# Altium PCB booster_pcb.PcbDoc
Units mil, origin at the board's own origin, x right, y up, seen from the top; angles counter-clockwise.
Board outline 900 x 700 mil, 4 copper layers (Top Layer, Layer 2, Layer 3, Bottom Layer), stack 23.756 mil thick; 17 components, 15 nets, 55 pads, 21 vias.
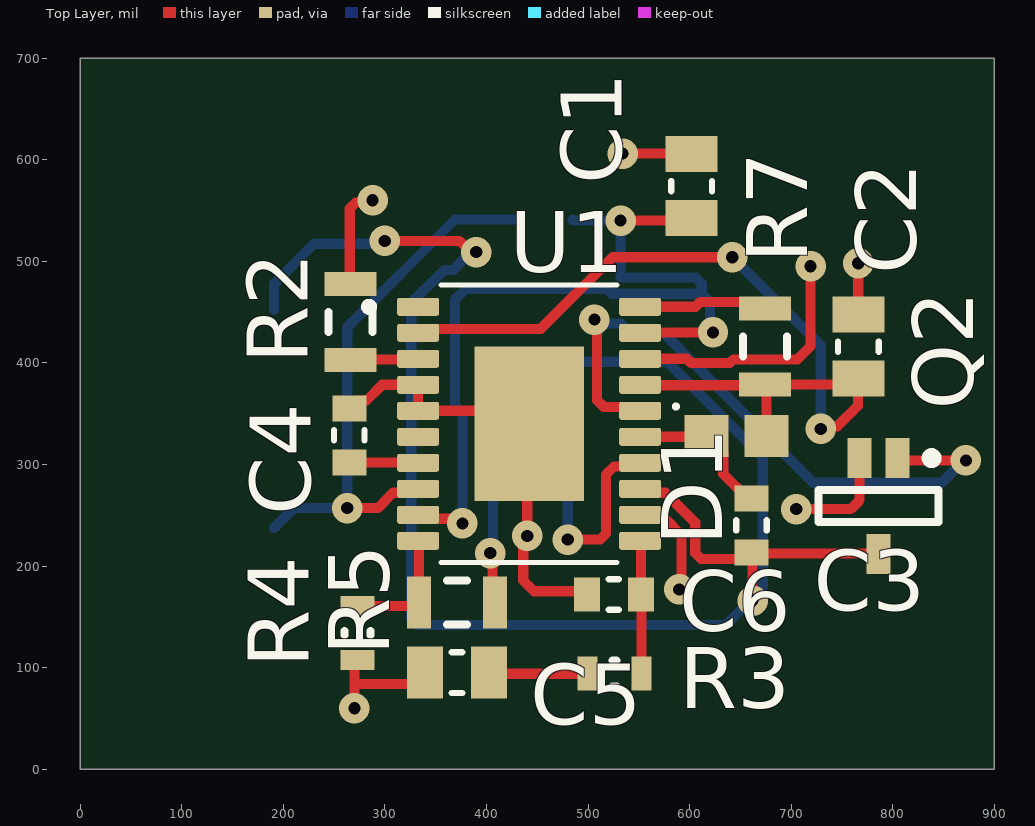
[diagram p0: Top Layer view]
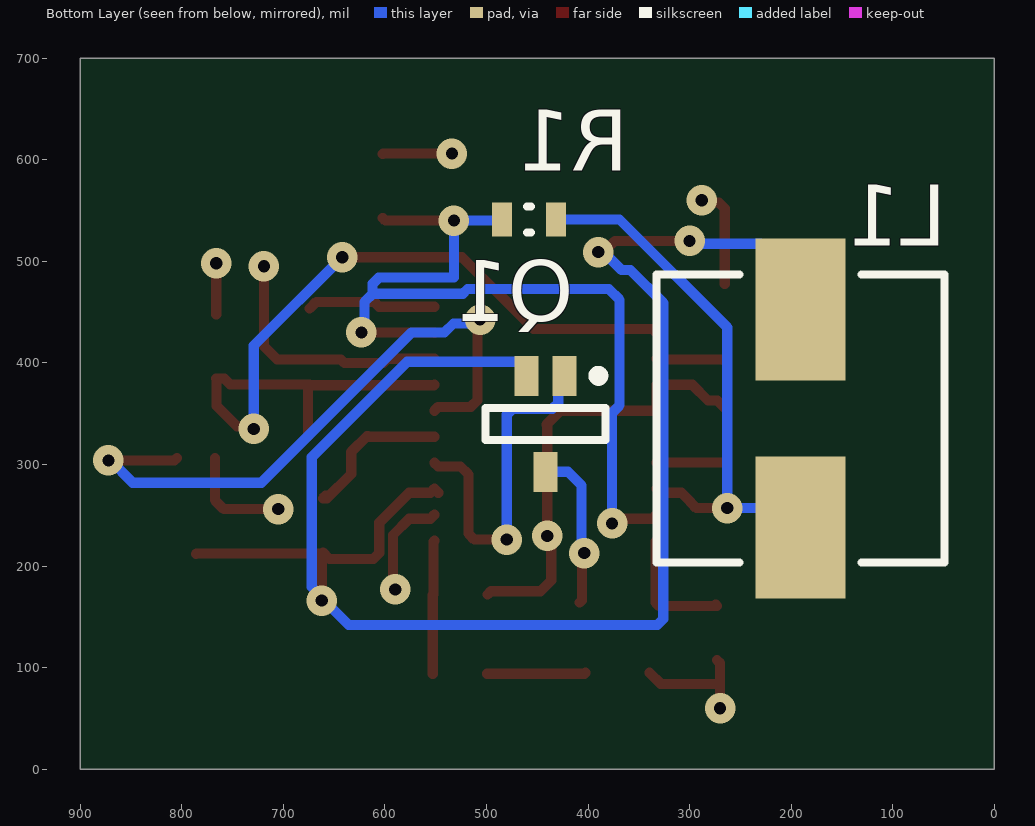
[diagram p1: Bottom Layer view, seen from below]
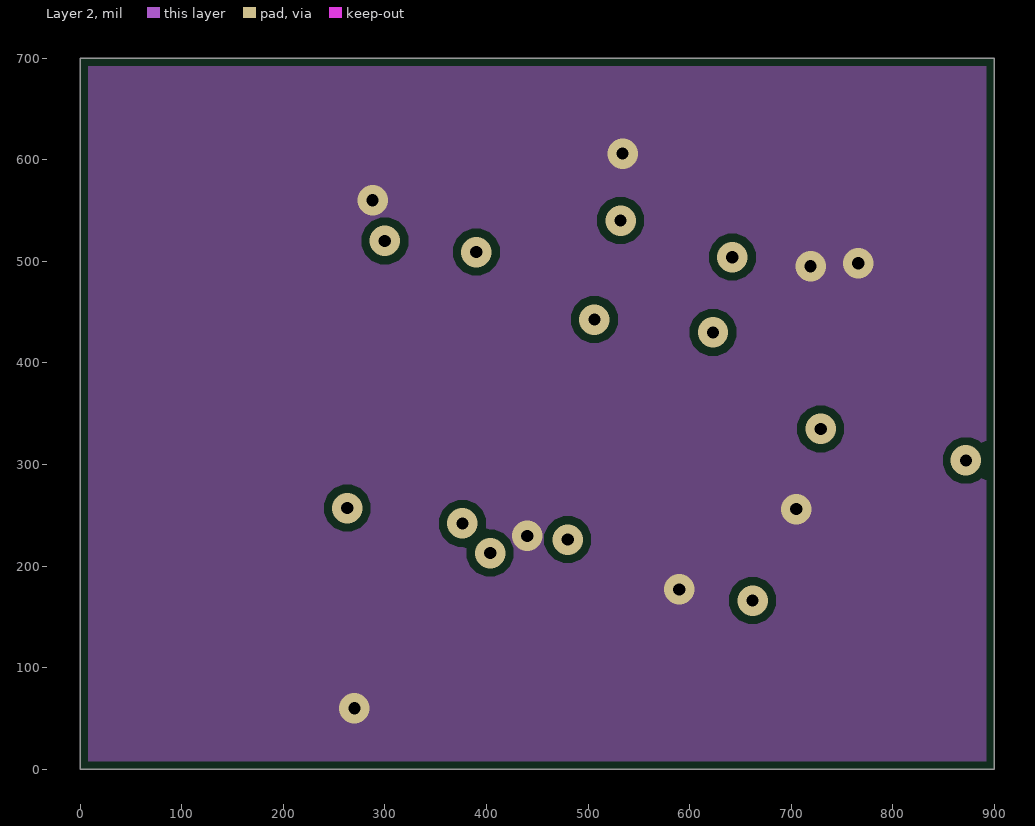
[diagram p2: Layer 2]
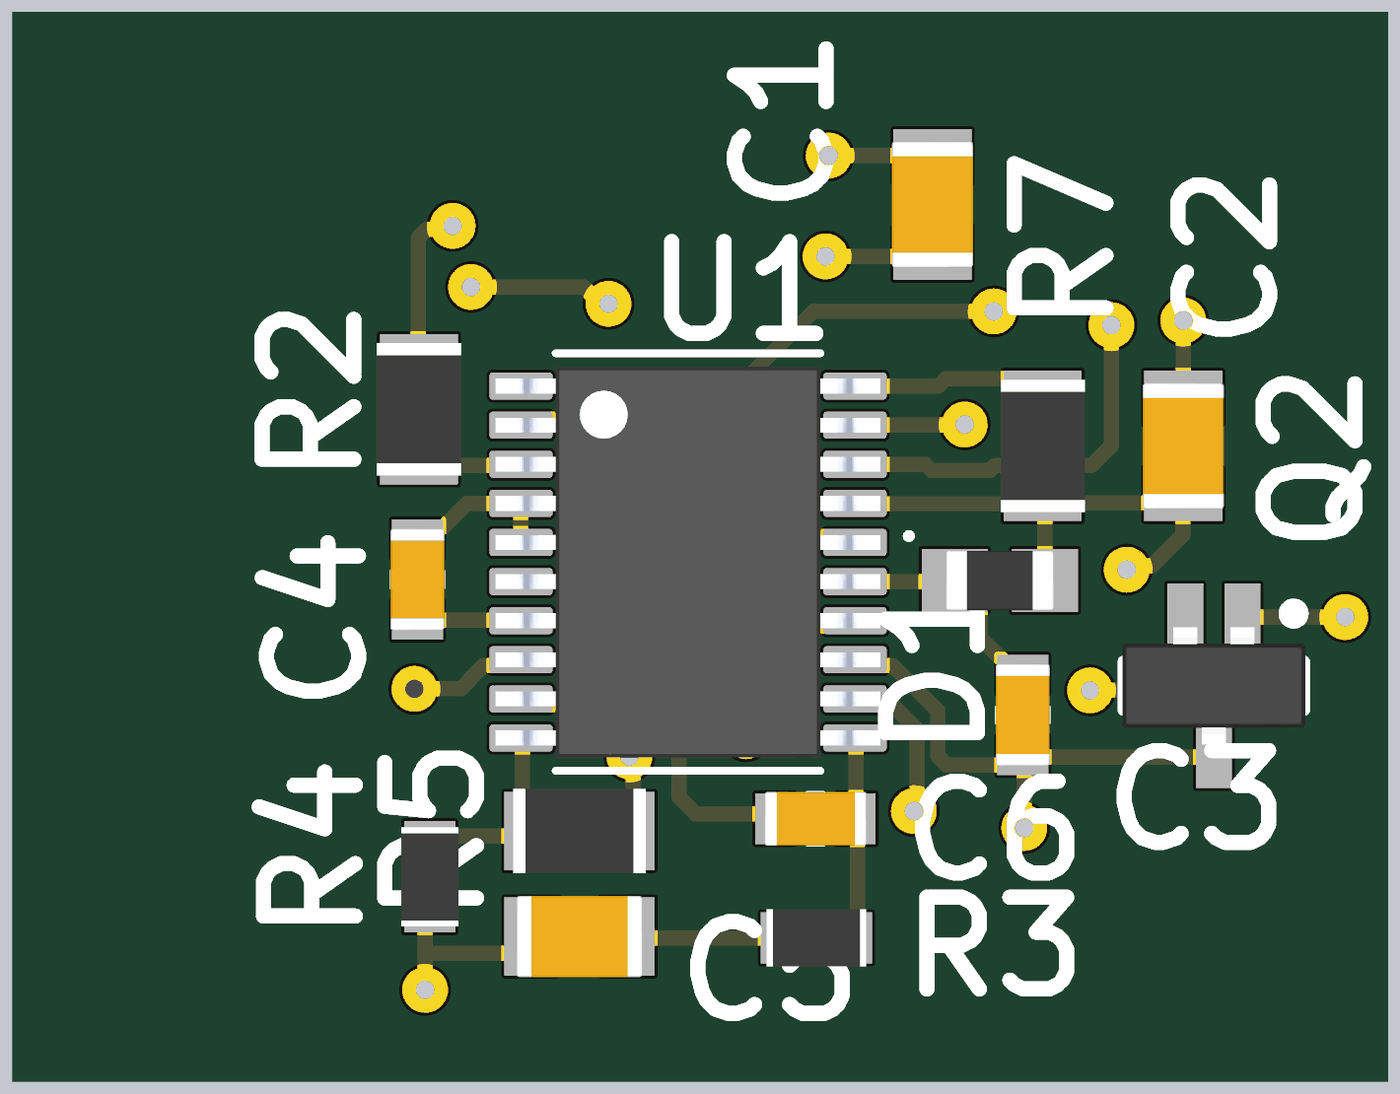
[diagram p3: 3D render of the assembled board from above, using the file's embedded part models]
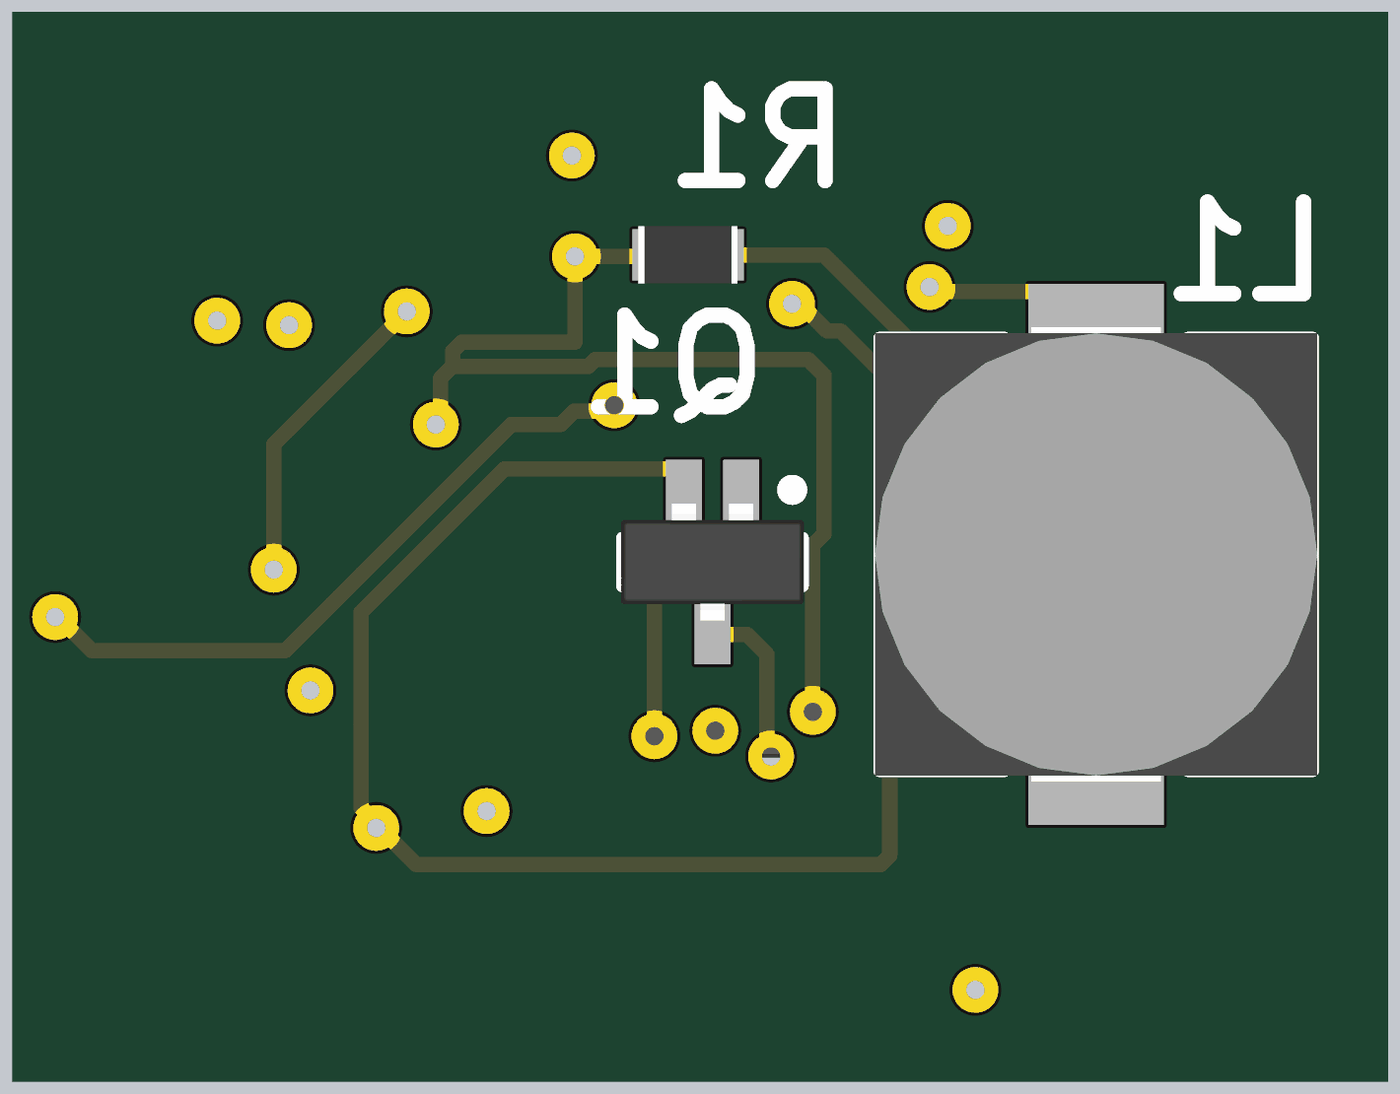
[diagram p4: 3D render of the assembled board from below, using the file's embedded part models]

## Layer stack, top to bottom
Top Solder: solder mask 0.4, Solder Resist, Dk 3.5
Top Layer: signal copper 1.4
Dielectric 2: prepreg 2.8, PP-006, Dk 4.1
Layer 2: signal copper 1.378
Dielectric 1: dielectric 12.6, FR-4, Dk 4.8
Layer 3: signal copper 1.378
Dielectric 3: prepreg 2.8, PP-006, Dk 4.1
Bottom Layer: signal copper 1.4
Bottom Solder: solder mask 0.4, Solder Resist, Dk 3.5

## Board outline
0,0 0,700 900,700 900,0

## Design rules (kind name [scope] priority, off if disabled: settings)
AssemblyTestPointUsage [All] p1: valid=2
AssemblyTestpoint [All] p1: testpointundercomponent=TRUE minsize=40 maxsize=100 preferedsize=60 minholesize=0 maxholesize=40 preferedholesize=32.01 testpointgrid=0.98 usegrid=TRUE gridoriginx=200 gridoriginy=200 gridtolerance=0.01 allowsidetop=TRUE allowsidebottom=TRUE
BoardOutlineClearance [All] p1: gap=7.87 ignorepadtopadclearanceinfootprint=FALSE
Clearance [All vs not OnLayer('Top Layer') and not OnLayer('BottomLayer')] p1: gap=7.87 ignorepadtopadclearanceinfootprint=FALSE except(3.94: Text-Text; 5: Arc-Arc Arc-Track Track-Track SMDPad-SMDPad; 5.91: Arc-Text Track-Text SMDPad-Text THPad-Text Via-Text Fill-Text Poly-Text Region-Text Text-Hole; 10: Arc-Via Arc-Hole Track-Via Track-Hole SMDPad-Via SMDPad-Hole THPad-Via THPad-Hole Via-Via Via-Hole Fill-Hole Poly-Hole Region-Hole; 12.99: Arc-THPad Track-THPad; 21.26: SMDPad-THPad THPad-THPad)
Clearance Clearance_1 [All vs OnLayer('Top Layer') or OnLayer('Bottom Layer')] p2: gap=7.87 ignorepadtopadclearanceinfootprint=TRUE except(3.54: Arc-Arc Arc-Track Track-Track; 3.94: Text-Text; 5: SMDPad-SMDPad; 5.91: Arc-Text Track-Text SMDPad-Text THPad-Text Via-Text Fill-Text Poly-Text Region-Text Text-Hole; 10: Arc-Via Arc-Hole Track-Via Track-Hole SMDPad-Via SMDPad-Hole THPad-Via THPad-Hole Via-Via Via-Hole Fill-Hole Poly-Hole Region-Hole; 12.99: Arc-THPad Track-THPad; 21.26: SMDPad-THPad THPad-THPad)
ComponentClearance [All] p1: gap=7.87 collisioncheckmode=3 verticalgap=7.87 showdistances=FALSE
DiffPairsRouting [All] p1: maxlimit=19.68 minlimit=7.87 mostfreqgap=11.81 toplayer_minwidth=7.87 toplayer_maxwidth=19.68 toplayer_prefwidth=11.81 midlayer1_minwidth=7.87 midlayer1_maxwidth=19.68 midlayer1_prefwidth=11.81 midlayer2_minwidth=7.87 midlayer2_maxwidth=19.68 midlayer2_prefwidth=11.81 bottomlayer_minwidth=7.87 bottomlayer_maxwidth=19.68 bottomlayer_prefwidth=11.81 maxuncoupledlength=590.55
FabricationTestPointUsage FabricationTestpointUsage [All] p1: valid=2 allowmultiple=FALSE
FabricationTestpoint [All] p1: side=3 testpointundercomponent=TRUE minsize=40 maxsize=100 preferedsize=60 minholesize=0 maxholesize=40 preferedholesize=32.01 testpointgrid=0.98 allowsidetop=TRUE allowsidebottom=TRUE usegrid=TRUE gridoriginx=200 gridoriginy=200 gridtolerance=0.01
Height [All] p1: minheight=0 maxheight=500 prefheight=0
HoleSize [All] p1: absolutevalues=TRUE maxlimit=248.03 minlimit=7.87 maxpercent=80.000 minpercent=20.000
HoleToHoleClearance [All] p1: gap=21.26 allowstackedmicrovias=TRUE
MinimumAnnularRing [All] p1: minimumring=7.87
MinimumSolderMaskSliver [All] p1: minsoldermaskwidth=0
PlaneClearance [All] p1: clearance=10
PlaneConnect [All] p1: pad.planeconnectstyle=Relief pad.reliefexpansion=20 pad.reliefentries=4 pad.reliefconductorwidth=10 pad.reliefairgap=10 via.planeconnectstyle=Direct via.reliefexpansion=20 via.reliefentries=4 via.reliefconductorwidth=10 via.reliefairgap=10
PolygonConnect [All] p1: thpad.connectstyle=Relief thpad.reliefconductorwidth=10 thpad.reliefentries=4 thpad.polygonreliefangle="90 Angle" thpad.airgapwidth=10 smdpad.connectstyle=Relief smdpad.reliefconductorwidth=10 smdpad.reliefentries=4 smdpad.polygonreliefangle="90 Angle" smdpad.airgapwidth=10 via.connectstyle=Direct via.reliefconductorwidth=10 via.reliefentries=4 via.polygonreliefangle="90 Angle" via.airgapwidth=10
RoutingCorners [All] p1: cornerstyle=45-Degree minsetback=100 maxsetback=200
RoutingLayers [All] p1: top layer_v5=TRUE mid layer 1_v5=FALSE mid layer 2_v5=FALSE bottom layer_v5=TRUE
RoutingVias [All] p1: holewidth=11.81 width=27.56 viastyle="Through Hole" minholewidth=7.87 minwidth=23.62 maxholewidth=248.03 maxwidth=263.78
SilkToSilkClearance [All] p1: silktosilkclearance=0
SilkToSolderMaskClearance [IsPad] p1: minsilkscreentomaskgap=0 clearancetoexposedcopper=TRUE
SolderMaskExpansion [All] p1: expansion=1.97 istentingtop=FALSE
UnRoutedNet [All] p1: checkbadconnections=TRUE
Width [All] p1: maxlimit=393.7 minlimit=7.87 preferedwidth=10
13 further rules are at their usual default settings.

## Classes and differential pairs
component class booster_sheet: C1 C2 C3 C4 C5 C6 D1 Q1 Q2 R1 R2 R3 R4 R5 R7 U1

## Components (designator, comment, footprint, x,y, rotation, side; value= is the part's Value field where it differs from the comment)
C1 "C" "CAPC2012X09L [0805]" 602,574 r270 top value=45u/30V
C2 "C" "CAPC2012X09L [0805]" 766,416 r270 top value=4u7p/10V
C3 "C" "CAPC1608X10L [0603]" 661,240 r270 top value=0.1p/10V
C4 "C" "CAPC1608X10L [0603]" 265,328.57 r270 top value=0.1p/10V
C5 "C" "CAPC2012X09L [0805]" 371,95 r0 top value=10n/10V
C6 "C" "CAPC1608X10L [0603]" 525.43,172 r0 top value=820p/10V
D1 "CDBU54" DIOC1709X10N 646,328 r0 top
L1 "PA4302.332NLT" INDP7474X56N 191,345 r270 bottom value=3u3
Q1 "IRLML6344TRPBF" SOT95P237X120-3N 442,340 r270 bottom
Q2 "IRLML6344TRPBF" SOT95P237X120-3N 786,259 r270 top
R1 "R" "RESC1608X05L [0603]" 458,541 r0 bottom value=10m/5%
R2 "R" "RESC2012X05L [0805]" 266,440 r270 top value=100K/10%
R3 "R" "RESC1608X05L [0603]" 526,94 r0 top value=4.75k/10%
R4 "R" "RESC1608X05L [0603]" 273,134 r90 top value=5K3/10%
R5 "R" "RESC2012X05L [0805]" 371,164 r180 top value=100K/10%
R7 "R" "RESC2012X05L [0805]" 674,416 r270 top value=100K/10%
U1 "LTC3769" LT3769FE 442,340 r0 top

## Footprints (in the part's own frame and the unit in brackets; to place one, negate y for a bottom-side part, rotate by r counter-clockwise, add the part's x,y. Pads: shape width x height; smd on the part's side, far side on the other; paste and mask are expansions set on the pad)
"CAPC1608X10L [0603]" [mm] "Chip Capacitor, 2-Leads, Body 1,60x0,80mm, IPC High Density"
  rect 0.65x0.85 smd: 1(-0.675,0) 2(0.675,0)
  silkscreen extent -0.13,-0.38 0.13,0.38, body extent -0.85,-0.45 0.85,0.45, height 0.96
"CAPC2012X09L [0805]" [mm] "Chip Capacitor, 2-Leads, Body 2,00x1,25mm, IPC High Density"
  rect 0.9x1.3 smd: 1(-0.8,0) 2(0.8,0)
  silkscreen extent -0.13,-0.51 0.13,0.51, body extent -1.05,-0.67 1.05,0.67, height 0.9
DIOC1709X10N [mm] "Chip Diode, 2-Leads, Body 1.70x0.90mm, IPC Medium Density"
  rect 1.1x1.05 smd: 1(-0.75,0) 2(0.75,0)
  silkscreen extent -1.56,0.69 -1.46,0.79, body extent -0.9,-0.5 0.9,0.5, height 0.95
INDP7474X56N [mm] "Precision Wire Wound Inductor, 2-Leads, Body 7.35x7.35mm, IPC Medium Density"
  rect 3.55x2.25 smd: 1(-2.725,0) 2(2.725,0)
  silkscreen extent -3.6,-3.6 3.6,3.6, body extent -3.77,-3.67 3.77,3.67, height 5.7
LT3769FE [mm] "20-lead FE package"
  rrect25% 1.05x0.45 smd: 1(-2.775,2.925) 2(-2.775,2.275) 3(-2.775,1.625) 4(-2.775,0.975) 5(-2.775,0.325) 6(-2.775,-0.325) 7(-2.775,-0.975) 8(-2.775,-1.625) 9(-2.775,-2.275) 10(-2.775,-2.925) 11(2.775,-2.925) 12(2.775,-2.275) 13(2.775,-1.625) 14(2.775,-0.975) 15(2.775,-0.325) 16(2.775,0.325) 17(2.775,0.975) 18(2.775,1.625) 19(2.775,2.275) 20(2.775,2.925)
  rect 2.74x3.86 smd paste-3: 21(0,0)
  silkscreen extent -4.1,-3.47 2.2,3.47, body extent -3.2,-3.25 3.2,3.25, height 1.2
"RESC1608X05L [0603]" [mm] "Chip Resistor, 2-Leads, Body 1,58x0,85mm, IPC High Density"
  rect 0.5x0.85 smd: 1(-0.675,0) 2(0.675,0)
  silkscreen extent -0.05,-0.33 0.05,0.33, body extent -0.82,-0.48 0.82,0.48, height 0.5
"RESC2012X05L [0805]" [mm] "Chip Resistor, 2-Leads, Body 2,05x1,25mm, IPC High Density"
  rect 0.6x1.3 smd: 1(-0.95,0) 2(0.95,0)
  silkscreen extent -0.25,-0.55 0.25,0.55, body extent -1.1,-0.7 1.1,0.7, height 0.5
SOT95P237X120-3N [mm] "SOT223, 3-Leads, Body 2.92x2.37mm (avg), Pitch 0.95mm, IPC Medium Density"
  rect 1x0.6 smd: 1(-1.2,0.475) 2(-1.2,-0.475) 3(1.2,0)
  silkscreen extent -1.32,-1.5 0.4,1.5, body extent -0.97,-1.52 0.97,1.52, height 1.2

## Part data
C1 C2 C5: "Standard capacitor", Package=0805
C3 C4 C6: "Standard capacitor", Package=0603
D1: library part sSchottky, "Schottky Diodes & Rectifiers VR=30V, IO=200mA", Package=0603, HelpURL=https://eu.mouser.com/ProductDetail/Comchip-Technology/CDBU54?qs=2qJf6qQ4IOILsV4GWiwJOA%3D%3D, PN=CDBU54
L1: library part Inductor, "Fixed Inductors 3.3uH SMT Inductor 7.5 x 7.5 x 5.6mm", Package="0805 (2012)", PN=PA4302.332NLT
Q1 Q2: library part sN-MOSFET, "MOSFET MOSFT 5.0A 29mOhm 30V 2.5V drv capable", Package=SOT-23-3, HelpURL=https://eu.mouser.com/ProductDetail/Infineon-IR/IRLML6344TRPBF?qs=9%252BKlkBgLFf2w4qS48UOXVw%3D%3D, PN=IRLML6344TRPBF
R1 R3 R4: "Standard resistor", Package=0603
R2 R5 R7: "Standard resistor", Package=0805
U1: library part Booster, "Switching Voltage Regulators 60V Low IQ Synchronous Boost Controller", Package=(TSSOP), HelpURL=https://eu.mouser.com/ProductDetail/Analog-Devices/LTC3769EFEPBF?qs=hVkxg5c3xu%2FNYTxkJcj7gA%3D%3D

## Via types
v1: diameter 30, hole 12, Top Layer to Bottom Layer, 21 vias

## Nets (pads, with @x,y where several pads share a name; then routed paths per layer and width w, separated by ;. In a path a pad name is that pad's centre, name@x,y a point inside that pad or via, vN(x,y) a via of type N, cw(c..) or ccw(c..) an arc to the next point about the centre after c; other vN are vias at no path point)
15V: C1.2 R1.2 U1.9 U1.19 | length 901.5
  Top Layer w10: U1.9 336.61,246.57 366.28,246.57 370.92,241.94 v1(376.33,241.94) ; v1(532,540) 599.5,540 C1.2 ; U1.19 551.47,429.78 622.78,429.78 v1(623,430)
  Bottom Layer w10: v1(376.33,241.94) 376.33,350.95 368.94,358.34 368.94,461.94 379.61,472.61 518.66,472.61 523.26,468 612,468 ; R1.2 485.57,540 v1(532,540) 532,483.86 606.14,483.86 612,478 612,468 ; v1(623,430) 620,433 620,460 612,468
24V: Q1.3 R5.1 | length 159.6
  Top Layer w10: v1(403.67,212.74) 406.04,210.38 406.04,166.37 R5.1
  Bottom Layer w10: v1(403.67,212.74) 406.33,215.4 406.33,279.33 419.76,292.76 Q1.3
BOOST_PW: C3.1 D1.1 U1.15 | length 151.9
  Top Layer w10: U1.15 615.68,327.2 D1.1 617.46,328 633.13,312.33 633.13,290.51 657.06,266.57 C3.1 C3.1@658.47,269.1
GND: C1.1 C2.1 C4.1 C5.1 C6.1 Q2.2 R2.1 R4.1 U1.4 U1.5 U1.12 U1.18 U1.21 | length 1243.9
  Top Layer w10: C4.1 272.8,362.94 281.95,362.94 297.4,378.39 U1.4 U1.5 427.2,352.8 441,339 440.16,338.16 v1(440.16,229.62) ; R2.1@265.5,477.9 265.5,551.89 271.36,557.75 285.75,557.75 v1(288,560) ; v1(270,60) 270,84 ; R4.1 270,104.43 270,84 ; C5.1 328.5,84 270,84 ; v1@436.28,227.84 436.28,185.82 446.86,175.24 495.61,175.24 C6.1 ; v1(534,606) 601.5,606 C1.1 ; U1.12 555.11,246.57 575.96,246.57 592,230.53 592,179.2 v1(589.8,177) ; U1.18 597.26,403.98 601.23,400 639.79,400 643.08,403.28 705.98,403.28 719,416.31 v1(719,495) ; v1(705,256) 758.44,256 767.3,264.86 Q2.2 ; C2.1 v1(766,498)
MBOT_BG: Q2.1 U1.16 | length 636.9
  Top Layer w10: v1(506.23,442.61) 508.81,440.03 508.81,363.19 515.35,356.65 547.39,356.65 U1.16 ; Q2.1 806.94,304 v1(872,304)
  Bottom Layer w10: v1(506.23,442.61) 510.06,438.78 532.45,438.78 541.23,430 573.61,430 721.61,282 848.04,282 870.04,304 v1(872,304)
MTOP_SW: C3.2 L1.1 Q1.2 Q2.3 U1.13 | length 1730.5
  Top Layer w10: v1(300,520) 373.59,520 384.59,509 v1(390,509) ; U1.13@547.39,272.17 U1.13 555.11,272.17 575.96,272.17 605.54,242.58 605.54,212.86 611.4,207 654.57,207 C3.2 ; v1(662,166) 662,212.43 785.33,212.43 Q2.3
  Bottom Layer w10: L1.1 191,477.87 230.29,517.17 297.17,517.17 v1(300,520) ; v1(390,509) 384.59,509 366.84,491.25 358.25,491.25 326,459 326,147.86 331.86,142 635.64,142 659.64,166 v1(662,166) 662,169.36 672,179.36 672,307 578,401 467.51,401 460.7,394.19 Q1.2
MTOP_TG: Q1.1 U1.14 | length 344.3
  Top Layer w10: v1(480,226) 511.85,226 517.71,231.86 517.71,290.19 525.47,297.95 547.59,297.95 U1.14
  Bottom Layer w10: Q1.1 429.31,381.24 429.31,360.54 435.17,354.68 474.14,354.68 480,348.83 v1(480,226)
NetC4_2: C4.2 U1.7 | length 67.9
  Top Layer w10: C4.2 265.19,301.81 332.56,301.81 U1.7
NetC5_2: C5.2 R3.1 | length 97.3
  Top Layer w10: C5.2 403.5,94 R3.1
NetC6_2: C6.2 R3.2 U1.11 | length 131.5
  Top Layer w10: U1.11 552,224.09 C6.2 552.79,171.21 R3.2@552.79,94
NetR2_2: R2.2 U1.3 | length 67.3
  Top Layer w10: R2.2 266.69,403.29 332.06,403.29 U1.3
NetR4_2: R4.2 R5.2 U1.10 | length 125
  Top Layer w10: R4.2@274.27,161.84 R4.2 330.17,160.57 R5.2 333.6,223.99 U1.10
NetR7_1: R7.1 U1.20 | length 127.5
  Top Layer w10: U1.20 605.73,455.16 610.57,460 667.4,460 R7.1
PGOOD_PW: C2.2 D1.2 R7.2 U1.2 U1.17 | length 884.6
  Top Layer w10: U1.2 336.61,433.43 453.43,433.43 524,504 v1(642,504) ; U1.17 551.65,377.99 R7.2@674,377.99 ; R7.2 752.22,378.6 758.13,384.5 C2.2 765.65,384.15 765.65,357.65 745.45,337.45 731.45,337.45 v1(729,335) ; D1.2 R7.2@675.53,377.07
  Bottom Layer w10: v1(642,504) 729,417 v1(729,335)
SENSE: L1.2 R1.1 U1.8 | length 548.2
  Top Layer w10: v1(263,257) 293.35,257 299.2,262.86 299.2,263.33 308.04,272.17 328.89,272.17 U1.8
  Bottom Layer w10: L1.2 210.28,257 v1(263,257) 263,434.89 369.11,541 R1.1
pads on no net: U1.1 U1.6

## Polygon pours and split planes (outlines as drawn)
GND on Layer 2 "GND_L02_P000" (solid, pour order 0): 0,700 900,700 900,0 0,0